# Altium PCB 凌阳外围系统.PcbDoc
Units mm, origin at the board's own origin, x right, y up, seen from the top; angles counter-clockwise.
Board outline 152.4 x 101.6 mm, 2 copper layers (Top Layer, Bottom Layer); 23 components, 19 nets, 79 pads, 0 vias.
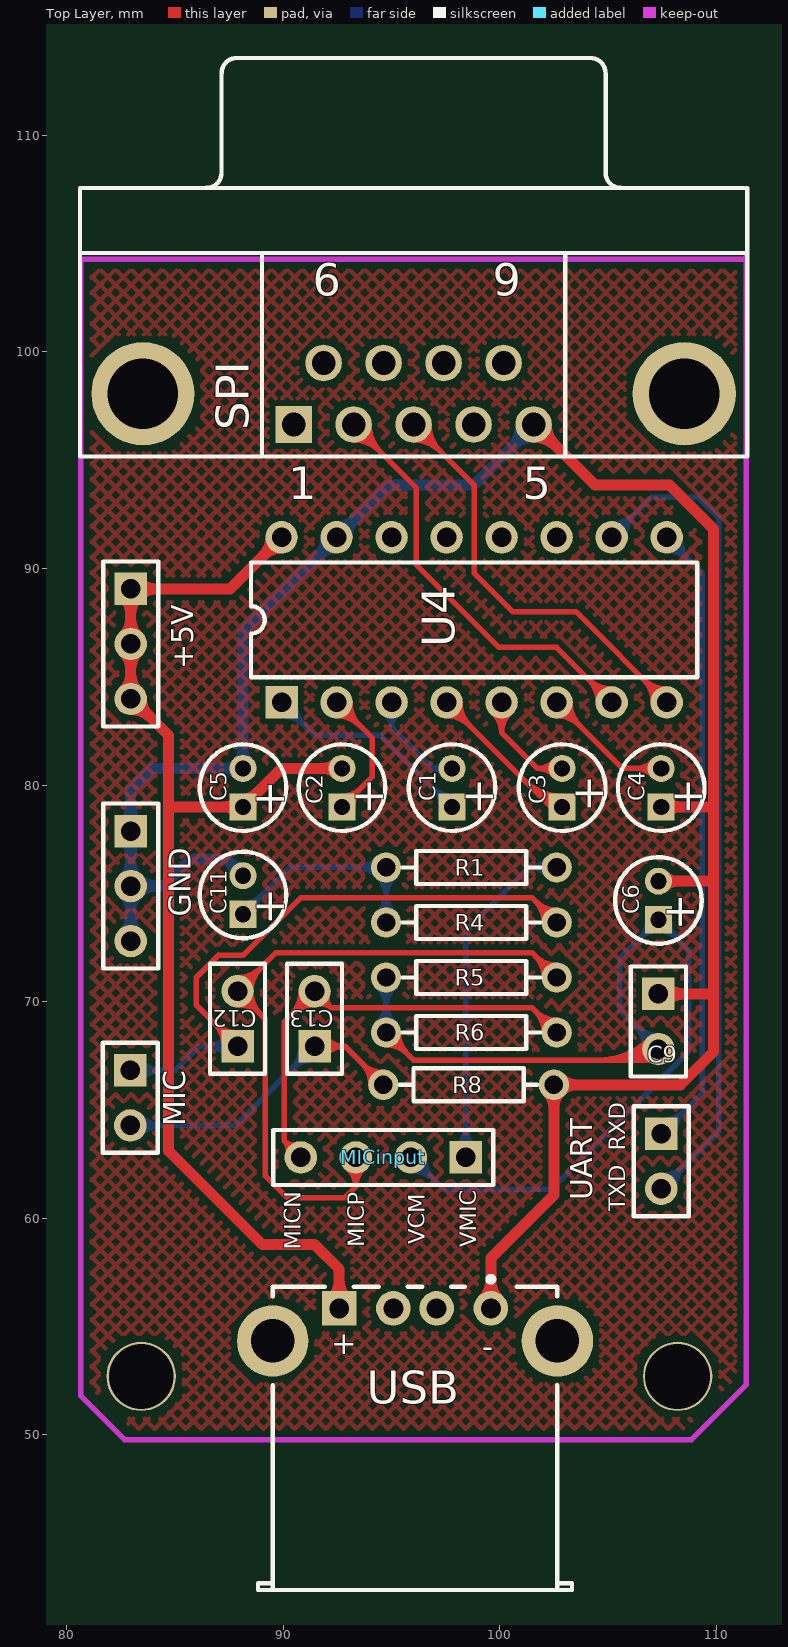
[diagram p0: Top Layer view]
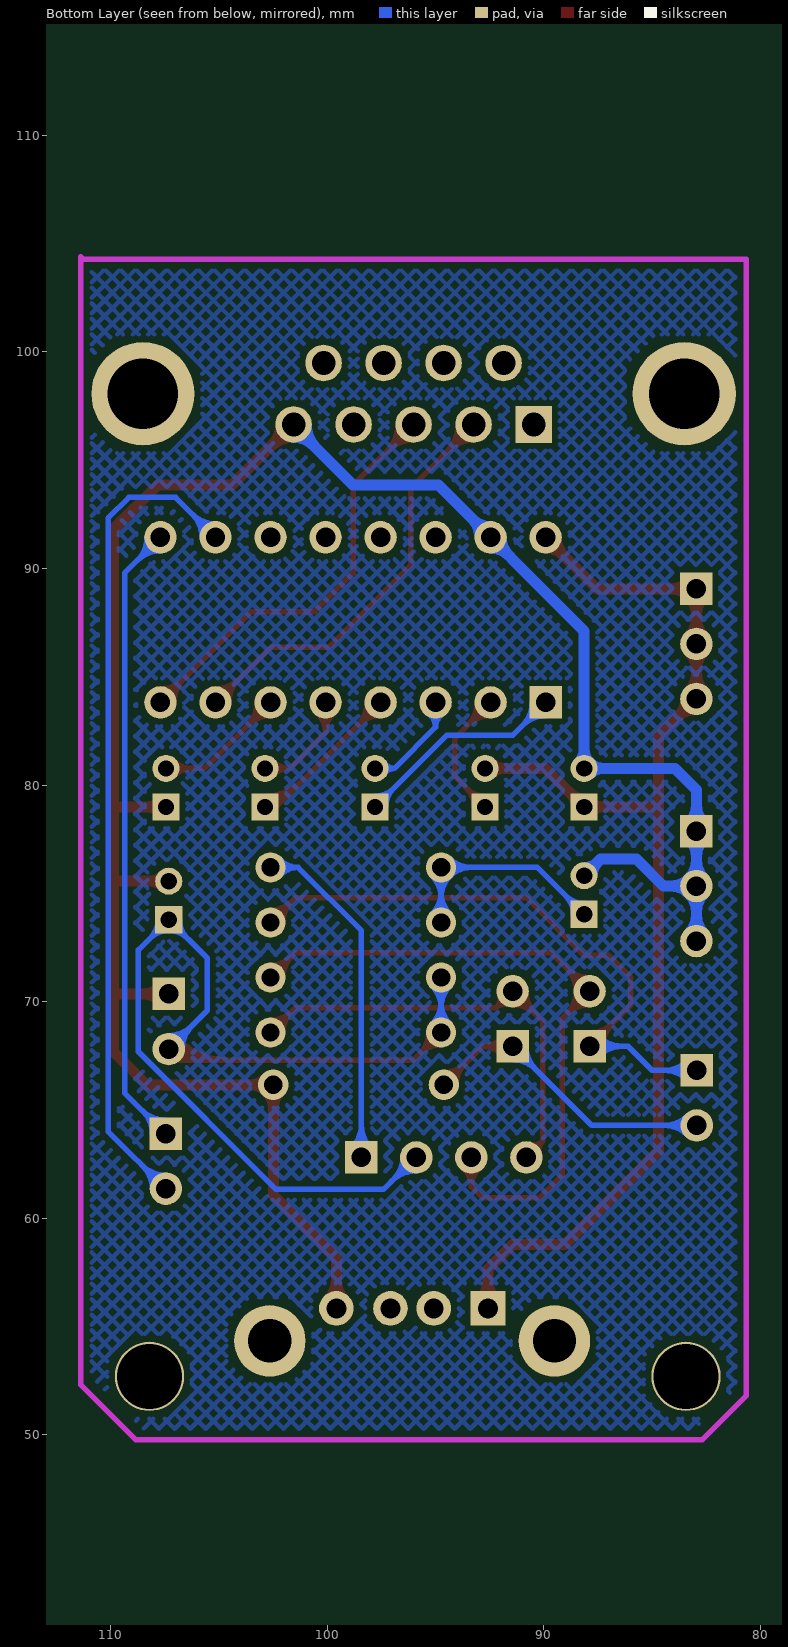
[diagram p1: Bottom Layer view, seen from below]

## Layer stack, top to bottom
Top Layer: signal copper 0.0356
Dielectric: dielectric 0.32, FR-4, Dk 4.8
Bottom Layer: signal copper 0.0356

## Board outline
25.4,25.4 177.8,25.4 177.8,127 25.4,127

## Design rules (kind name [scope] priority, off if disabled: settings)
Clearance [All] p1: gap=0.254
ComponentClearance [All] p1: gap=0.254 collisioncheckmode=3 verticalgap=0.254
PolygonConnect [All] p1: connectstyle=Relief reliefconductorwidth=0.254 reliefentries=4 polygonreliefangle="90 Angle"
RoutingVias [All] p1: holewidth=0.711 width=1.27 viastyle="Through Hole" minholewidth=0.711 minwidth=1.27 maxholewidth=0.711 maxwidth=1.27
SolderMaskExpansion [All] p1: expansion=0.102
TestPointUsage [All] p1: valid=0 allowmultiple=FALSE
Testpoint [All] p1: side=15 testpointundercomponent=TRUE minsize=1.016 maxsize=2.54 preferedsize=1.524 minholesize=0 maxholesize=1.016 preferedholesize=0.813 testpointgrid=0.025 style=1023 order=0-112345678
Width GND [InNet('GND')] p1: maxlimit=0.508 minlimit=0.508 preferedwidth=0.508
Width power [InNet('VCC')] p2: maxlimit=0.508 minlimit=0.508 preferedwidth=0.508
Width [All] p3: maxlimit=0.254 minlimit=0.254 preferedwidth=0.254
17 further rules are at their usual default settings.

## Components (designator, comment, footprint, x,y, rotation, side; value= is the part's Value field where it differs from the comment)
+5V "PZ_3" HDR-3 81.788,82.804 r270 top
C1 "DJDR" DJDR_4mm 97.79,78.994 r90 top
C2 "DJDR" DJDR_4mm 92.71,78.994 r90 top
C3 "DJDR" DJDR_4mm 102.87,78.994 r90 top
C4 "DJDR" DJDR_4mm 107.442,78.994 r90 top
C5 "DJDR" DJDR_4mm 88.138,78.994 r90 top
C6 "Cap Pol1" DJDR_4mm 107.315,73.787 r90 top
C9 "Cap" CPDR 107.315,69.088 r270 top
C11 "DJDR" DJDR_4mm 88.138,74.041 r90 top
C12 "Cap" CPDR 87.884,69.215 r90 top
C13 "Cap" CPDR 91.44,69.215 r90 top
GND "PZ_3" HDR-3 81.788,71.628 r270 top (schematic designator VSS)
MIC "MKF" HDR-2 81.788,62.992 r270 top
MICinput "PZ_4" HDR-4 92.075,64.135 r180 top
R1 "Res2" RSE 98.679,76.2 r0 top
R4 "Res2" RSE 98.679,73.66 r180 top
R5 "Res2" RSE 98.679,71.12 r180 top
R6 "Res2" RSE 98.679,68.58 r180 top
R8 "Res2" RSE 98.552,66.167 r180 top
SPI "CKT_9" COM-9 107.696,96.647 r0 top
U4 "MAX232ACPE" DIP-16 98.806,87.63 r0 top
UART "PZ_2" HDR-2 106.299,60.071 r270 top
USB "PZ_4" USB-5V 92.456,53.34 r270 top

## Footprints (in the part's own frame and the unit in brackets; to place one, negate y for a bottom-side part, rotate by r counter-clockwise, add the part's x,y. Pads: shape width x height; smd on the part's side, far side on the other; paste and mask are expansions set on the pad)
COM-9 [mm] "串口通信口"
  rect 1.69x1.69 hole 1.09: 1(-17.224,0.002)
  round 1.69 hole 1.09: 2(-14.454,0.002) 3(-11.684,0.002) 4(-8.914,0.002) 5(-6.144,0.002) 6(-15.839,2.842) 7(-13.069,2.842) 8(-10.299,2.842) 9(-7.529,2.842)
  round 4.76 hole 3.26: 10(-24.179,1.422) 11(0.811,1.422)
  silkscreen extent -27.08,-1.48 3.72,16.92
CPDR [mm] "瓷片电容"
  rect 1.5x1.5 hole 0.9: 1(-1.27,0)
  round 1.5 hole 0.9: 2(1.27,0)
  silkscreen extent -2.54,-1.27 2.54,1.27
DIP-16 [mm] "DIP; 16 Leads; Row Spacing 7.62 mm; Pitch 2.54 mm"
  rect 1.5x1.5 hole 0.9: 1(-8.89,-3.81)
  round 1.5 hole 0.9: 2(-6.35,-3.81) 3(-3.81,-3.81) 4(-1.27,-3.81) 5(1.27,-3.81) 6(3.81,-3.81) 7(6.35,-3.81) 8(8.89,-3.81) 9(8.89,3.81) 10(6.35,3.81) 11(3.81,3.81) 12(1.27,3.81) 13(-1.27,3.81) 14(-3.81,3.81) 15(-6.35,3.81) 16(-8.89,3.81)
  silkscreen extent -10.3,-2.65 10.3,2.65
DJDR_4mm [mm] "电解电容4mm"
  rect 1.25x1.25 hole 0.75: 1(0,0)
  round 1.25 hole 0.75: 2(1.778,0)
  silkscreen extent -1.11,-2 2.89,2
HDR-2 [mm] "2排针"
  rect 1.5x1.5 hole 0.9: 1(-3.84,1.148)
  round 1.5 hole 0.9: 2(-1.3,1.148)
  silkscreen extent -5.11,-0.12 -0.03,2.42
HDR-3 [mm] "3排针"
  rect 1.5x1.5 hole 0.9: 1(-6.253,1.165)
  round 1.5 hole 0.9: 2(-3.713,1.165) 3(-1.173,1.165)
  silkscreen extent -7.52,-0.11 0.1,2.43
HDR-4 [mm] "4排针"
  rect 1.5x1.5 hole 0.9: 1(-6.35,1.322)
  round 1.5 hole 0.9: 2(-3.81,1.322) 3(-1.27,1.322) 4(1.27,1.322)
  silkscreen extent -7.62,0.05 2.54,2.59
RSE [mm] "直插电阻1/8W"
  round 1.4 hole 0.85: 1(-3.937,0) 2(3.937,0)
  silkscreen extent -3.17,-0.76 3.17,0.76
USB-5V [mm] "USB接口"
  rect 1.6x1.6 hole 0.92: 1(-2.503,0.124)
  round 1.6 hole 0.92: 2(-2.503,2.624) 3(-2.503,4.624) 4(-2.503,7.124)
  round 3.3 hole 2: 5(-1.002,-2.946) 6(-1.002,10.194)
  silkscreen extent -3.98,-3.63 10.5,10.87

## Part data
+5V GND: "排针——3"
C1 C2 C3 C4 C5 C11: "电解电容"
C6: "Polarized Capacitor (Radial)"
C9 C12 C13: "Capacitor"
MIC: "麦克风"
MICinput USB: "排针——4"
R1 R4 R5 R6 R8: "Resistor"
SPI: "9针串口头_母"
U4: "+5V Powered, Multi-Channel RS-232 Driver/Receiver"
UART: "排针——2"

## Free pads (board coordinates)
  round 3.2 hole 2.997: 0(83.439,52.705) 1(108.204,52.705)

## Nets (pads, with @x,y where several pads share a name; then routed paths per layer and width w, separated by ;. In a path a pad name is that pad's centre, name@x,y a point inside that pad or via, vN(x,y) a via of type N, cw(c..) or ccw(c..) an arc to the next point about the centre after c; other vN are vias at no path point)
GND: C4.1 C5.2 C6.2 C9.1 C11.2 GND.1 GND.2 GND.3 R8.1 SPI.5 U4.15 USB.4 | length 137.7
  Top Layer w0.508: USB.4@99.193,56.229 ccw(c98.261,57.161) 99.58,57.161 ccw(c100.898,57.161) USB.4@99.966,56.229 ; USB.4 99.58,58.178 102.489,61.087 R8.1 108.331,66.167 109.855,67.691 109.855,91.821 107.823,93.853 104.394,93.853 101.598,96.649 SPI.5 ; SPI.5@101.552,96.058 cw(c101.552,94.52) 102.639,95.608 ; SPI.5@102.143,96.649 ccw(c103.459,96.649) 102.528,95.719 ; R8.1@102.174,65.852 cw(c101.412,65.09) 102.489,65.09 cw(c103.566,65.09) 102.804,65.852 cw(c103.566,65.09) 103.566,66.167 cw(c103.566,67.244) R8.1@102.804,66.482 ; C9.1 109.855,70.358 ; C6.2 109.855,75.565 ; C4.1 109.855,78.994 ; C6.2@107.577,75.303 cw(c108.211,74.669) 108.211,75.565 cw(c108.211,76.461) C6.2@107.577,75.827 ; C9.1@107.666,70.007 cw(c108.512,69.161) 108.512,70.358 cw(c108.512,71.555) C9.1@107.666,70.709 ; C4.1@107.704,78.732 cw(c108.338,78.098) 108.338,78.994 cw(c108.338,79.89) C4.1@107.704,79.256
  Bottom Layer w0.508: GND.3@82.602,73.152 ccw(c81.756,73.998) 82.953,73.998 ccw(c84.15,73.998) GND.3@83.304,73.152 ; GND.2@82.602,74.99 cw(c81.756,74.144) 82.953,74.144 cw(c84.15,74.144) 83.304,74.99 cw(c84.15,74.144) 84.15,75.341 cw(c84.15,76.538) 83.304,75.692 cw(c84.15,76.538) 82.953,76.538 cw(c81.756,76.538) GND.2@82.602,75.692 ; GND.1@82.602,77.53 cw(c81.756,76.684) 82.953,76.684 cw(c84.15,76.684) GND.1@83.304,77.53 ; GND.1@82.602,78.232 ccw(c81.756,79.078) 82.953,79.078 ccw(c84.15,79.078) GND.1@83.304,78.232 ; GND.3 82.953,79.778 83.947,80.772 C5.2 88.138,87.122 94.869,93.853 98.806,93.853 101.552,96.599 SPI.5 ; GND.2 84.485,75.341 85.725,76.581 87.376,76.581 C11.2 ; C11.2@87.767,75.819 ccw(c86.871,75.819) 87.505,76.452 ccw(c88.138,77.086) C11.2@88.138,76.19 ; C5.2@87.876,80.51 ccw(c87.242,79.876) 87.242,80.772 ccw(c87.242,81.668) 87.876,81.034 ccw(c87.242,81.668) 88.138,81.668 ccw(c89.034,81.668) C5.2@88.4,81.034 ; U4.15@91.96,91.44 cw(c90.763,91.44) 91.609,90.593 cw(c92.456,89.747) U4.15@92.456,90.944 ; U4.15@92.456,91.936 ccw(c92.456,93.133) 93.303,92.287 ccw(c94.149,91.44) U4.15@92.952,91.44 ; 100.508,95.555 ccw(c99.414,96.649) SPI.5@100.961,96.649 ; 100.628,95.675 cw(c101.552,94.752) SPI.5@101.552,96.058
MICN: C13.2 MICinput.4 R6.1 | length 30.3
  Top Layer w0.254: MICinput.4@90.203,62.975 ccw(c89.604,63.136) 90.043,63.575 ; MICinput.4@90.643,63.415 cw(c90.482,64.014) 90.043,63.575 ; MICinput.4 90.043,63.575 ; C13.2@90.817,70.485 cw(c89.313,70.485) 90.376,69.421 cw(c91.44,68.358) C13.2@91.44,69.862 ; C13.2@91.071,70.485 cw(c90.18,70.485) 90.81,69.855 cw(c91.44,69.225) C13.2@91.44,70.116 ; C13.2@91.602,69.883 cw(c91.763,69.284) 92.202,69.723 ; C13.2@92.042,70.323 ccw(c92.641,70.162) 92.202,69.723 ; R6.1@102.043,68.58 ccw(c100.66,68.58) 101.638,69.558 ccw(c102.616,70.536) R6.1@102.616,69.153 ; R6.1@102.297,68.58 ccw(c101.527,68.58) 102.071,69.125 ccw(c102.616,69.669) R6.1@102.616,68.899 ; R6.1 101.473,69.723 92.202,69.723 ; 90.043,63.575 90.043,69.088 C13.2 92.202,69.723
MICP: C12.2 MICinput.3 R5.1 | length 45.2
  Top Layer w0.254: C12.2@87.884,69.862 cw(c87.884,68.358) 88.948,69.421 cw(c90.011,70.485) 88.507,70.485 cw(c90.011,70.485) 88.948,71.549 cw(c87.884,72.612) C12.2@87.884,71.108 ; C12.2@87.884,70.116 cw(c87.884,69.225) 88.514,69.855 cw(c89.144,70.485) 88.253,70.485 cw(c89.144,70.485) 88.514,71.115 cw(c87.884,71.745) C12.2@87.884,70.854 ; MICinput.3@92.942,62.338 cw(c92.205,61.468) 93.345,61.468 ; MICinput.3@93.106,62.532 cw(c92.67,62.016) 93.345,62.016 cw(c94.02,62.016) MICinput.3@93.584,62.532 ; MICinput.3 93.345,61.468 ; MICinput.3@93.748,62.338 ccw(c94.485,61.468) 93.345,61.468 ; R5.1@102.043,71.12 ccw(c100.66,71.12) 101.638,72.098 ccw(c102.616,73.076) R5.1@102.616,71.693 ; R5.1@102.297,71.12 ccw(c101.527,71.12) 102.071,71.665 ccw(c102.616,72.209) R5.1@102.616,71.439 ; R5.1 101.473,72.263 89.662,72.263 C12.2 89.154,69.215 89.154,61.976 90.17,60.96 92.837,60.96 93.345,61.468
NetC1_1: C1.1 U4.1 | length 15.5
  Bottom Layer w0.254: U4.1@89.916,83.197 cw(c89.916,81.693) 90.98,82.756 cw(c92.043,83.82) U4.1@90.539,83.82 ; U4.1@89.916,83.451 cw(c89.916,82.56) 90.546,83.19 cw(c91.176,83.82) U4.1@90.285,83.82 ; U4.1 91.44,82.296 94.488,82.296 C1.1 ; C1.1@97.292,78.994 ccw(c96.09,78.994) 96.94,79.844 ccw(c97.79,80.694) C1.1@97.79,79.492
NetC1_2: C1.2 U4.3 | length 7.3
  Bottom Layer w0.254: U4.3@94.658,83.296 cw(c94.259,82.677) 94.996,82.677 ; U4.3 94.996,82.677 ; U4.3@95.334,83.296 ccw(c95.733,82.677) 94.996,82.677 ; C1.2@97.365,80.512 ccw(c96.901,80.228) 96.901,80.772 ; C1.2@97.365,81.032 cw(c96.901,81.316) 96.901,80.772 ; C1.2 96.901,80.772 ; 94.996,82.677 96.901,80.772
NetC2_1: C2.1 U4.2 | length 11.7
  Top Layer w0.254: U4.2@92.456,83.197 cw(c92.456,81.693) 93.52,82.756 cw(c94.583,83.82) U4.2@93.079,83.82 ; U4.2@92.456,83.451 cw(c92.456,82.56) 93.086,83.19 cw(c93.716,83.82) U4.2@92.825,83.82 ; U4.2 94.107,82.169 94.107,80.391 C2.1 ; C2.1@92.71,79.492 ccw(c92.71,80.694) 93.56,79.844 ccw(c94.41,78.994) C2.1@93.208,78.994
NetC3_1: C3.1 U4.4 | length 15.4
  Top Layer w0.254: U4.4@97.536,83.197 cw(c97.536,81.693) 98.6,82.756 cw(c99.663,83.82) U4.4@98.159,83.82 ; U4.4@97.536,83.451 cw(c97.536,82.56) 98.166,83.19 cw(c98.796,83.82) U4.4@97.905,83.82 ; U4.4 102.362,78.994 C3.1 ; 101.153,80.203 ccw(c102.87,81.921) C3.1@102.87,79.492 ; 101.586,79.77 ccw(c102.87,81.053) C3.1@102.87,79.238 ; 102.02,79.336 ccw(c102.87,80.186) C3.1@102.87,78.984
NetC3_2: C3.2 U4.5 | length 10
  Top Layer w0.254: U4.5@99.66,83.356 cw(c98.821,82.423) 100.076,82.423 ; U4.5@99.829,83.545 cw(c99.333,82.993) 100.076,82.993 cw(c100.819,82.993) U4.5@100.323,83.545 ; U4.5 100.076,82.423 ; U4.5@100.492,83.356 ccw(c101.331,82.423) 100.076,82.423 ; C3.2@102.505,80.433 ccw(c101.727,79.709) 101.727,80.772 ; C3.2@102.505,81.111 cw(c101.727,81.835) 101.727,80.772 ; C3.2 101.727,80.772 ; 100.076,82.423 101.727,80.772
NetC4_2: C4.2 U4.6 | length 11.7
  Top Layer w0.254: U4.6@102.616,83.197 cw(c102.616,81.693) 103.68,82.756 cw(c104.743,83.82) U4.6@103.239,83.82 ; U4.6@102.616,83.451 cw(c102.616,82.56) 103.246,83.19 cw(c103.876,83.82) U4.6@102.985,83.82 ; U4.6 105.664,80.772 C4.2 ; C4.2@107.09,80.42 ccw(c106.24,79.57) 106.24,80.772 ccw(c106.24,81.974) C4.2@107.09,81.124
NetC11_1: C11.1 R1.1 R4.2 | length 22.1
  Bottom Layer w0.254: C11.1 90.297,76.2 R1.1 R4.2 ; C11.1@88.138,74.539 ccw(c88.138,75.741) 88.988,74.891 ccw(c89.838,74.041) C11.1@88.636,74.041 ; R4.2@94.337,74.065 ccw(c93.359,75.043) 94.742,75.043 ccw(c96.125,75.043) R4.2@95.147,74.065 ; R1.1@94.337,76.605 cw(c93.359,77.583) 93.359,76.2 cw(c93.359,74.817) 94.337,75.795 cw(c93.359,74.817) 94.742,74.817 cw(c96.125,74.817) R1.1@95.147,75.795 ; R4.2@94.516,73.886 ccw(c93.972,74.43) 94.742,74.43 ccw(c95.512,74.43) R4.2@94.968,73.886 ; R1.1@94.516,76.426 cw(c93.972,76.97) 93.972,76.2 cw(c93.972,75.43) 94.516,75.974 cw(c93.972,75.43) 94.742,75.43 cw(c95.512,75.43) R1.1@94.968,75.974
NetC12_1: C12.1 MIC.1 R4.1 | length 42.7
  Top Layer w0.254: C12.1@87.261,67.945 ccw(c85.757,67.945) 86.82,69.009 ccw(c87.884,70.072) C12.1@87.884,68.568 ; C12.1@87.515,67.945 ccw(c86.624,67.945) 87.254,68.575 ccw(c87.884,69.205) C12.1@87.884,68.314 ; C12.1 85.979,69.85 85.979,71.12 86.995,72.136 88.138,72.136 90.805,74.803 101.473,74.803 R4.1 ; R4.1@102.043,73.66 ccw(c100.66,73.66) 101.638,74.638 ccw(c102.616,75.616) R4.1@102.616,74.233 ; R4.1@102.297,73.66 ccw(c101.527,73.66) 102.071,74.205 ccw(c102.616,74.749) R4.1@102.616,73.979
  Bottom Layer w0.254: MIC.1 84.993,66.832 86.106,67.945 C12.1 ; MIC.1@83.197,66.571 cw(c83.827,65.941) 83.827,66.832 cw(c83.827,67.723) MIC.1@83.197,67.093 ; MIC.1@83.377,66.391 cw(c84.44,65.328) 84.44,66.832 cw(c84.44,68.336) MIC.1@83.377,67.273 ; C12.1@87.443,67.504 ccw(c86.38,66.441) 86.38,67.945 ccw(c86.38,69.449) C12.1@87.443,68.386 ; C12.1@87.623,67.684 ccw(c86.993,67.054) 86.993,67.945 ccw(c86.993,68.836) C12.1@87.623,68.206
NetC13_1: C13.1 MIC.2 R8.2 | length 28.2
  Top Layer w0.254: C13.1 92.837,67.945 ; C13.1@91.715,67.698 cw(c92.267,67.202) 92.267,67.945 cw(c92.267,68.688) C13.1@91.715,68.192 ; C13.1@91.904,67.529 cw(c92.837,66.69) 92.837,67.945 ; C13.1@91.904,68.361 ccw(c92.837,69.2) 92.837,67.945 ; R8.2@94.042,66.167 ccw(c92.659,66.167) 93.637,67.145 ccw(c94.615,68.123) R8.2@94.615,66.74 ; R8.2@94.296,66.167 ccw(c93.526,66.167) 94.07,66.712 ccw(c94.615,67.256) R8.2@94.615,66.486 ; R8.2 92.837,67.945
  Bottom Layer w0.254: MIC.2 87.787,64.292 C13.1 ; MIC.2@83.197,64.031 cw(c83.827,63.401) 83.827,64.292 cw(c83.827,65.183) MIC.2@83.197,64.553 ; MIC.2@83.377,63.851 cw(c84.44,62.788) 84.44,64.292 cw(c84.44,65.796) MIC.2@83.377,64.733 ; C13.1@90.817,67.945 cw(c89.313,67.945) 90.376,66.881 cw(c91.44,65.818) C13.1@91.44,67.322 ; C13.1@91.071,67.945 cw(c90.18,67.945) 90.81,67.315 cw(c91.44,66.685) C13.1@91.44,67.576
NetSPI_2: SPI.2 U4.7 | length 27.6
  Top Layer w0.254: SPI.2@93.242,95.931 cw(c93.242,94.26) 94.423,95.442 ; SPI.2@93.242,96.185 cw(c93.242,95.127) 93.99,95.875 ; SPI.2 93.242,96.623 96.139,93.726 96.139,90.17 99.949,86.36 102.616,86.36 U4.7 ; SPI.2@93.706,96.649 ccw(c94.889,96.649) 94.052,95.813 ; SPI.2@93.96,96.649 ccw(c95.756,96.649) 94.486,95.379 ; U4.7@104.533,83.82 ccw(c103.029,83.82) 104.092,84.884 ccw(c105.156,85.947) U4.7@105.156,84.443 ; U4.7@104.787,83.82 ccw(c103.896,83.82) 104.526,84.45 ccw(c105.156,85.08) U4.7@105.156,84.189
NetSPI_3: SPI.3 U4.8 | length 27.6
  Top Layer w0.254: SPI.3@96.012,95.931 cw(c96.012,94.202) 97.234,95.425 ; SPI.3@96.012,96.185 cw(c96.012,95.07) 96.801,95.858 ; SPI.3 96.012,96.647 98.806,93.853 98.806,89.789 100.584,88.011 103.505,88.011 U4.8 ; SPI.3@96.476,96.649 ccw(c97.601,96.649) 96.805,95.854 ; SPI.3@96.73,96.649 ccw(c98.468,96.649) 97.239,95.42 ; U4.8@107.073,83.82 ccw(c105.569,83.82) 106.632,84.884 ccw(c107.696,85.947) U4.8@107.696,84.443 ; U4.8@107.327,83.82 ccw(c106.436,83.82) 107.066,84.45 ccw(c107.696,85.08) U4.8@107.696,84.189
NetU4_9: U4.9 UART.1 | length 36.5
  Bottom Layer w0.254: UART.1 107.472,63.911 109.347,65.786 109.347,89.789 U4.9 ; UART.1@107.447,64.28 ccw(c107.447,65.231) UART.1@108.12,64.559 ; UART.1@107.447,64.534 ccw(c107.447,66.099) 108.553,64.992 ; U4.9@107.696,90.817 cw(c107.696,89.313) 108.76,90.376 cw(c109.823,91.44) U4.9@108.319,91.44 ; U4.9@107.696,91.071 cw(c107.696,90.18) 108.326,90.81 cw(c108.956,91.44) U4.9@108.065,91.44 ; UART.1@107.816,63.911 cw(c108.646,63.911) UART.1@108.059,64.498 ; UART.1@108.07,63.911 cw(c109.514,63.911) 108.493,64.932
NetU4_10: U4.10 UART.2 | length 45.7
  Bottom Layer w0.254: U4.10 107.001,93.285 109.153,93.285 110.109,92.329 110.109,64.008 107.472,61.371 UART.2 ; U4.10@105.156,91.809 ccw(c105.156,92.7) 105.786,92.07 ccw(c106.416,91.44) U4.10@105.525,91.44 ; U4.10@105.156,92.063 ccw(c105.156,93.567) 106.22,92.504 ccw(c107.283,91.44) U4.10@105.779,91.44 ; UART.2@107.447,61.74 ccw(c107.447,62.691) 108.12,62.019 ; UART.2@107.447,61.994 ccw(c107.447,63.559) 108.553,62.452 ; UART.2@107.816,61.371 cw(c108.646,61.371) 108.059,61.958 ; UART.2@108.07,61.371 cw(c109.514,61.371) 108.493,62.392
VCC: +5V.1 +5V.2 +5V.3 C2.2 C5.1 U4.16 USB.1 | length 74.8
  Top Layer w0.508: +5V.3@82.602,84.328 ccw(c81.756,85.174) 82.953,85.174 ccw(c84.15,85.174) +5V.3@83.304,84.328 ; +5V.2@82.602,86.166 cw(c81.756,85.32) 82.953,85.32 cw(c84.15,85.32) +5V.2@83.304,86.166 ; +5V.2@82.602,86.868 ccw(c81.756,87.714) 82.953,87.714 ccw(c84.15,87.714) +5V.2@83.304,86.868 ; +5V.1@82.602,88.706 cw(c81.756,87.86) 82.953,87.86 cw(c84.15,87.86) 83.304,88.706 cw(c84.15,87.86) 84.15,89.057 cw(c84.15,90.254) +5V.1@83.304,89.408 ; +5V.3@82.953,83.481 cw(c82.953,82.103) 83.928,83.077 ; +5V.3@83.449,83.977 ccw(c84.465,83.977) 83.747,83.258 ; 84.709,78.994 C5.1 89.916,80.772 C2.2 ; C5.1@87.876,78.732 ccw(c87.242,78.098) 87.242,78.994 ccw(c87.242,79.89) C5.1@87.876,79.256 ; C5.1@88.138,79.365 ccw(c88.138,80.261) 88.771,79.627 ccw(c89.405,78.994) C5.1@88.509,78.994 ; U4.16@89.42,91.44 cw(c88.223,91.44) 89.069,90.593 cw(c89.916,89.747) U4.16@89.916,90.944 ; U4.16 87.533,89.057 +5V.1 +5V.3 83.028,83.977 84.709,82.296 84.709,63.119 89.027,58.801 91.44,58.801 92.58,57.661 USB.1 ; USB.1@92.193,56.229 ccw(c91.261,57.161) 92.58,57.161 ccw(c93.898,57.161) USB.1@92.966,56.229 ; C2.2@92.448,80.51 ccw(c91.814,79.876) 91.814,80.772 ccw(c91.814,81.668) C2.2@92.448,81.034
VCM: C6.1 C9.2 MICinput.2 R5.2 R6.2 | length 74.8
  Top Layer w0.254: R6.2@94.742,68.007 cw(c94.742,66.624) 95.72,67.602 cw(c96.698,68.58) R6.2@95.315,68.58 ; R6.2@94.742,68.261 cw(c94.742,67.491) 95.287,68.035 cw(c95.831,68.58) R6.2@95.061,68.58 ; R6.2 96.012,67.31 106.807,67.31 C9.2 ; 104.585,67.31 ccw(c104.585,70.548) C9.2@106.874,68.259 ; 105.198,67.31 ccw(c105.198,69.935) C9.2@107.054,68.079 ; 105.811,67.31 ccw(c105.811,69.322) C9.2@107.234,67.899 ; 106.424,67.31 ccw(c106.424,68.709) C9.2@107.413,67.72
  Bottom Layer w0.254: R6.2@94.337,68.985 ccw(c93.359,69.963) 94.742,69.963 ccw(c96.125,69.963) R6.2@95.147,68.985 ; R5.2@94.337,70.715 cw(c93.359,69.737) 94.742,69.737 cw(c96.125,69.737) R5.2@95.147,70.715 ; R6.2@94.516,68.806 ccw(c93.972,69.35) 94.742,69.35 ccw(c95.512,69.35) R6.2@94.968,68.806 ; R5.2@94.516,70.894 cw(c93.972,70.35) 94.742,70.35 cw(c95.512,70.35) R5.2@94.968,70.894 ; R6.2 R5.2 ; MICinput.2@95.885,62.19 cw(c95.885,60.56) 97.037,61.713 ; MICinput.2@95.885,62.444 cw(c95.885,61.428) 96.604,62.146 ; MICinput.2 95.937,62.813 97.409,61.341 102.362,61.341 108.712,67.691 108.712,72.39 C6.1 105.537,72.009 105.537,69.596 C9.2 ; MICinput.2@96.254,62.813 ccw(c97.019,62.813) 96.478,62.272 ; MICinput.2@96.508,62.813 ccw(c97.886,62.813) 96.912,61.838 ; C9.2@106.692,67.818 ccw(c105.188,67.818) 106.251,68.882 ccw(c107.315,69.945) C9.2@107.315,68.441 ; C6.1@106.817,73.787 cw(c105.615,73.787) 106.465,72.937 cw(c107.315,72.087) 107.315,73.289 cw(c107.315,72.087) 108.165,72.937 cw(c109.015,73.787) C6.1@107.813,73.787 ; C9.2@106.946,67.818 ccw(c106.055,67.818) 106.685,68.448 ccw(c107.315,69.078) C9.2@107.315,68.187
VMIC: MICinput.1 R1.2 | length 22.6
  Bottom Layer w0.254: MICinput.1@97.984,63.254 ccw(c96.921,64.317) 98.425,64.317 ccw(c99.929,64.317) MICinput.1@98.866,63.254 ; MICinput.1@98.164,63.074 ccw(c97.534,63.704) 98.425,63.704 ccw(c99.316,63.704) MICinput.1@98.686,63.074 ; MICinput.1 98.425,73.279 101.346,76.2 ; R1.2@102.186,75.821 ccw(c101.346,75.079) 101.346,76.2 ; R1.2@102.186,76.579 cw(c101.346,77.321) 101.346,76.2 ; R1.2@102.377,75.989 ccw(c101.909,75.576) 101.909,76.2 ccw(c101.909,76.824) R1.2@102.377,76.411 ; R1.2 101.346,76.2
pads on no net: SPI.1 SPI.4 SPI.6 SPI.7 SPI.8 SPI.9 SPI.10 SPI.11 U4.11 U4.12 U4.13 U4.14 USB.2 USB.3 USB.5 USB.6

## Polygon pours and split planes (outlines as drawn)
no net on Top Layer (hatched 45Degree grid 0.508 track 0.203): 81.153,103.759 110.871,103.759 110.871,52.705 108.712,50.546 108.458,50.292 83.058,50.292 81.153,52.197
no net on Bottom Layer (hatched 45Degree grid 0.508 track 0.203): 81.153,103.759 110.871,103.759 110.871,52.705 108.458,50.292 83.058,50.292 81.28,52.07 81.153,52.197

## Keep-outs
Keep-Out Layer:
  lines w0.254: 80.645,51.816 82.677,49.784 107.569,49.784 108.839,49.784 111.252,52.197 111.379,52.324 111.379,53.594 111.379,104.394 111.252,104.267 80.645,104.267 80.645,52.197 80.645,51.816

## Silkscreen, mask and mechanical layers (free items; w line width, h text height)
Top Overlay:
  text "RXD" at 105.791,63.119 h0.76 r90
  text "TXD" at 105.791,60.325 h0.76 r90
  text "VCM" at 96.52,58.801 h0.76 r90
  text "MICP" at 93.726,58.674 h0.76 r90
  text "VMIC" at 98.896,58.664 h0.76 r90
  text "MICN" at 90.805,58.547 h0.76 r90
  text "+" at 92.202,53.721 h1.02
  text "-" at 99.187,53.594 h1.02

## Text inside footprints (layer, text, board x,y; h text height)
C1: Top Overlay "+" at 99.695,78.613 h1.5 r90
C2: Top Overlay "+" at 94.615,78.613 h1.5 r90
C3: Top Overlay "+" at 104.775,78.74 h1.5 r90
C4: Top Overlay "+" at 109.347,78.613 h1.5 r90
C5: Top Overlay "+" at 90.043,78.486 h1.5 r90
C6: Top Overlay "+" at 108.966,73.279 h1.5 r90
C11: Top Overlay "+" at 90.043,73.533 h1.5 r90
SPI: Top Overlay "1" at 90.222,93.194 h1.5; Top Overlay "5" at 101.052,93.194 h1.5; Top Overlay "9" at 99.667,102.594 h1.5; Top Overlay "6" at 91.357,102.594 h1.5